# Altium PCB PCB-15_19.PcbDoc (part 4 of 4)
Units mm, origin at the board's own origin, x right, y up, seen from the top; angles counter-clockwise.
Board outline 190 x 150 mm, 6 copper layers (Top Layer, Mid-Layer 1, VCC3V3, GND, Mid-Layer 2, Bottom Layer), stack 1.173 mm thick; 129 components, 396 nets, 1206 pads, 565 vias.
Unrouted connection lines stored in the file: 15.
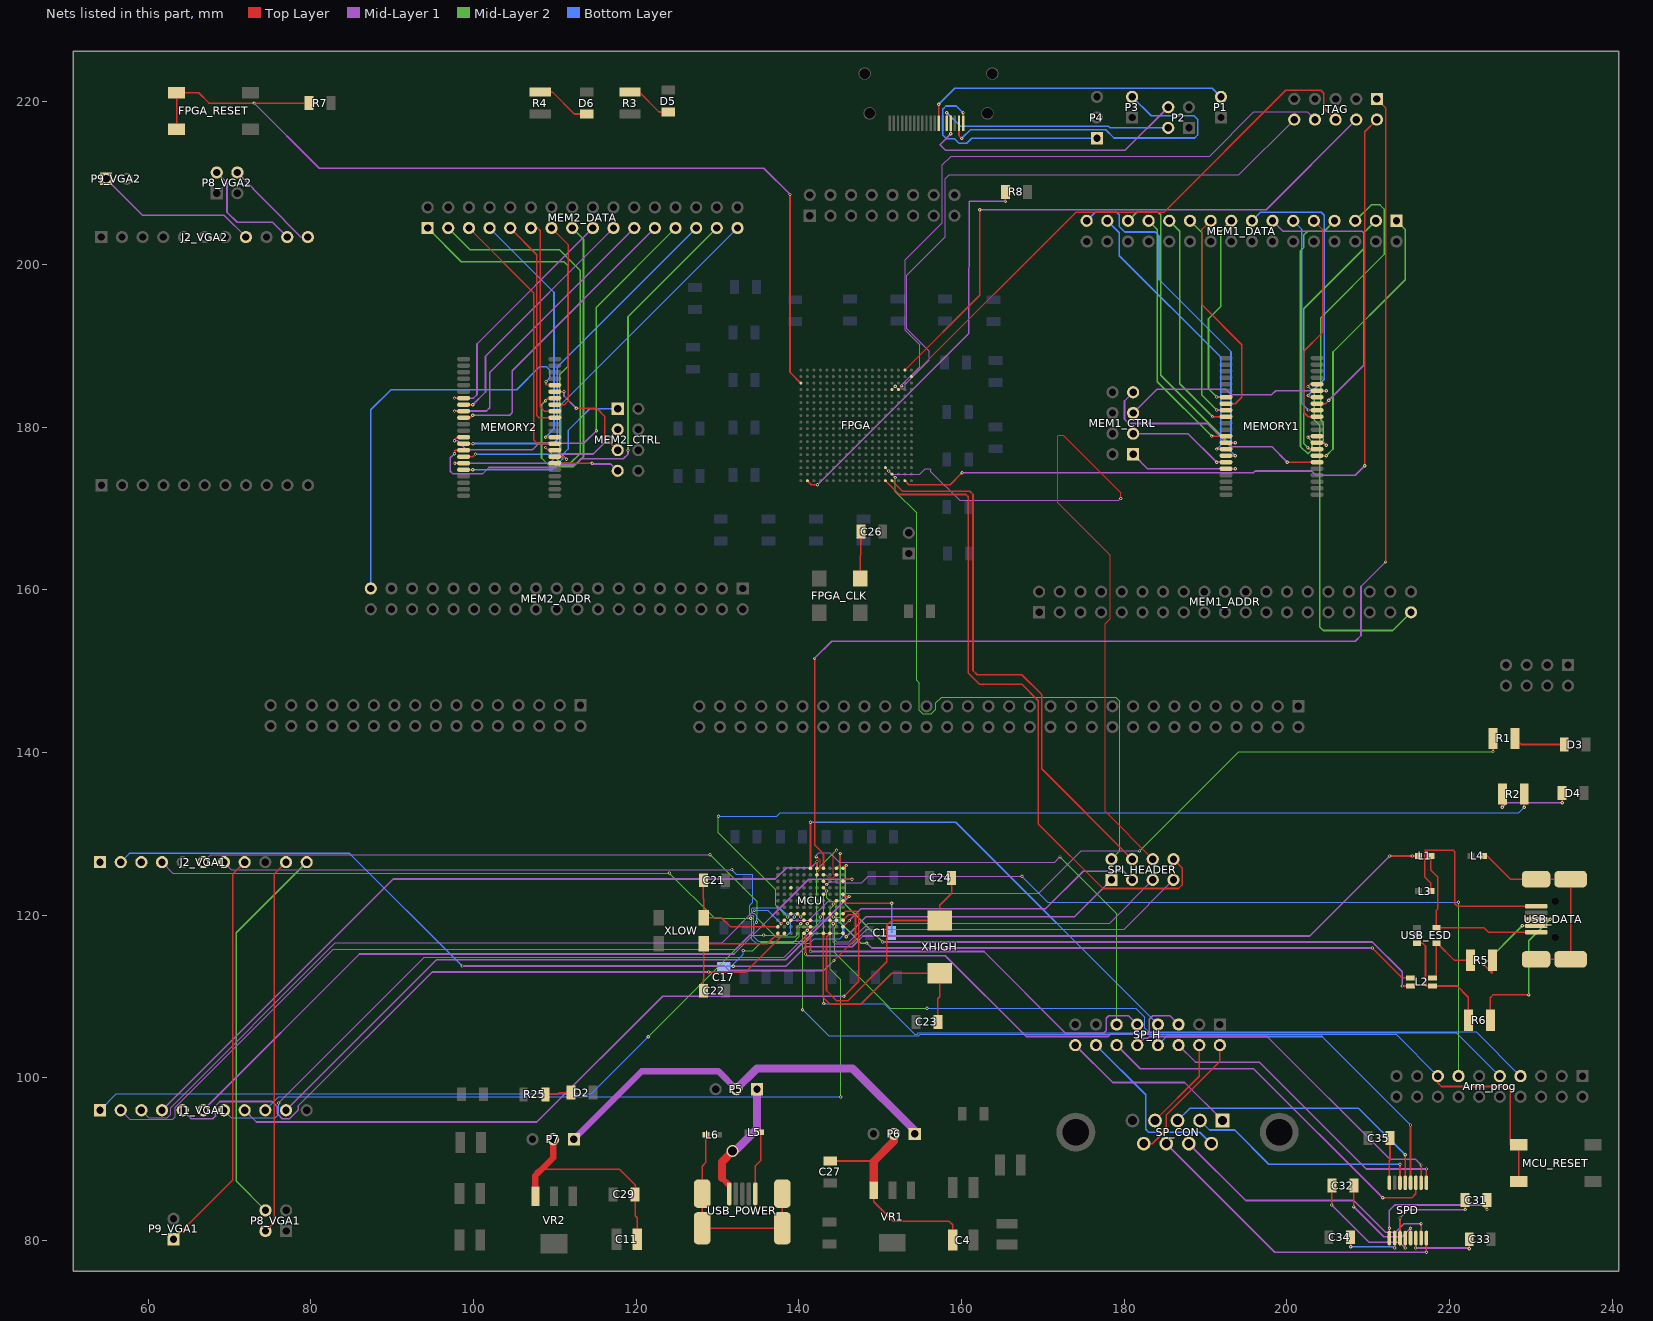
[diagram p8: the nets of this part, all layers, seen from the top]

## Via types
v1: diameter 0.4, hole 0.2, Top Layer to Bottom Layer, 548 vias
v2: diameter 0.4, hole 0.25, Top Layer to Bottom Layer, tented top, 9 vias
v3: diameter 7, hole 5, Top Layer to Bottom Layer, 4 vias
v4: diameter 1.3, hole 0.9, Top Layer to Bottom Layer, 3 vias
v5: diameter 1.5, hole 1.1, Top Layer to Bottom Layer, 1 vias

## Nets (pads, with @x,y where several pads share a name; then routed paths per layer and width w, separated by ;. In a path a pad name is that pad's centre, name@x,y a point inside that pad or via, vN(x,y) a via of type N, cw(c..) or ccw(c..) an arc to the next point about the centre after c; other vN are vias at no path point) (continued)
I_MEMORY.ADDR18_Data_mem1: MEM1_ADDR.37 MEMORY1.18 | length 43.7
  Top Layer w0.2: v1(202.59,184.988) 202.888,185.286 MEMORY1.18@203.72,185.286
  Mid-Layer 2 w0.2: v1(202.59,184.988) 203.377,184.201 203.377,180.858 204.038,180.198 204.038,155.423 204.47,154.991 213.03,154.991 MEM1_ADDR.37@215.265,157.226
I_MEMORY.ADDR18_Data_mem2: MEM2_ADDR.37 MEMORY2.18 | length 49.4
  Top Layer w0.2: v1(108.915,185.572) 108.915,185.184 MEMORY2.18@109.994,185.159
  Bottom Layer w0.2: MEM2_ADDR.37@87.376,160.147 87.376,182.118 89.865,184.607 105.334,184.607 108.128,187.401 108.979,187.401 109.372,187.007 109.372,186.03 v1(108.915,185.572)
I_MEMORY.BUS0_Data_mem1: MEM1_DATA.1 MEMORY1.7 | length 34.5
  Top Layer w0.2: MEMORY1.7@203.72,176.486 204.844,176.486 v1(204.851,176.479)
  Mid-Layer 2 w0.2: v1(204.851,176.479) 205.669,177.297 205.669,189.235 214.554,198.12 214.554,204.292 MEM1_DATA.1@213.487,205.359
I_MEMORY.BUS0_Data_mem2: MEM2_DATA.1 MEMORY2.7 | length 45.3
  Top Layer w0.2: MEMORY2.7@109.994,176.359 111.125,176.359 v1(111.442,176.042)
  Mid-Layer 2 w0.2: MEM2_DATA.1@94.361,204.47 98.501,200.33 111.125,200.33 111.633,199.822 111.633,187.475 110.617,186.459 110.617,176.867 v1(111.442,176.042)
I_MEMORY.BUS1_Data_mem1: MEM1_DATA.3 MEMORY1.8 | length 33
  Top Layer w0.2: v1(202.59,177.47) 202.774,177.286 MEMORY1.8@203.72,177.286
  Mid-Layer 2 w0.2: v1(202.59,177.47) 202.082,177.978 202.082,194.539 209.474,201.93 209.474,203.886 MEM1_DATA.3@210.947,205.359
I_MEMORY.BUS1_Data_mem2: MEM2_DATA.3 MEMORY2.8 | length 47.7
  Top Layer w0.2: v1(108.864,177.482) 109.188,177.159 MEMORY2.8@109.994,177.159
  Mid-Layer 2 w0.2: MEM2_DATA.3@96.901,204.47 99.568,201.803 110.566,201.803 113.124,199.246 113.124,176.753 111.912,175.541 110.805,175.541 v1(108.864,177.482)
I_MEMORY.BUS2_Data_mem1: MEM1_DATA.5 MEMORY1.9 | length 38.4
  Top Layer w0.2: MEMORY1.9@203.72,178.086 204.54,178.086 v1(204.851,177.775)
  Mid-Layer 2 w0.2: v1(204.851,177.775) 204.47,178.156 204.47,180.594 204.153,180.911 204.153,193.408 212.014,201.27 212.014,206.756 211.455,207.315 210.363,207.315 MEM1_DATA.5@208.407,205.359
I_MEMORY.BUS2_Data_mem2: MEM2_DATA.5 MEMORY2.9 | length 32.1
  Top Layer w0.2: MEM2_DATA.5@99.441,204.47 107.391,196.52 107.391,178.435 107.844,177.983 109.364,177.983 109.364,177.959 MEMORY2.9@109.994,177.959
I_MEMORY.BUS3_Data_mem1: MEM1_DATA.7 MEMORY1.10 | length 35.6
  Top Layer w0.2: v1(202.59,178.74) 202.737,178.886 MEMORY1.10@203.72,178.886
  Mid-Layer 2 w0.2: v1(202.59,178.74) 203.098,178.232 203.098,177.209 202.597,176.708 201.682,177.571 201.682,201.682 202.057,202.057 202.057,203.581 202.565,204.089 204.597,204.089 MEM1_DATA.7@205.867,205.359
I_MEMORY.BUS3_Data_mem2: MEM2_DATA.7 MEMORY2.10 | length 30.6
  Top Layer w0.2: v1(108.864,178.765) 108.871,178.759 MEMORY2.10@109.994,178.759
  Bottom Layer w0.2: MEM2_DATA.7@101.981,204.47 109.905,196.546 109.905,179.806 v1(108.864,178.765)
I_MEMORY.BUS4_Data_mem1: MEM1_DATA.9 MEMORY1.13 | length 26.8
  Top Layer w0.2: MEM1_DATA.9@203.327,205.359 204.394,204.292 204.394,191.637 202.09,189.333 202.09,181.811 202.616,181.286 MEMORY1.13@203.72,181.286
I_MEMORY.BUS4_Data_mem2: MEM2_DATA.9 MEMORY2.13 | length 26.7
  Top Layer w0.2: MEM2_DATA.9@104.521,204.47 107.791,201.2 107.791,181.42 108.053,181.159 MEMORY2.13@109.994,181.159
I_MEMORY.BUS5_Data_mem1: MEM1_DATA.11 MEMORY1.14 | length 25.1
  Top Layer w0.2: v1(202.616,182.093) 202.622,182.086 MEMORY1.14@203.72,182.086
  Bottom Layer w0.2: MEM1_DATA.11@200.787,205.359 201.854,204.292 201.854,182.855 v1(202.616,182.093)
I_MEMORY.BUS5_Data_mem2: MEM2_DATA.11 MEMORY2.14 | length 24.9
  Top Layer w0.2: MEM2_DATA.11@107.061,204.47 107.874,204.47 108.191,204.153 108.191,182.49 108.723,181.959 MEMORY2.14@109.994,181.959
I_MEMORY.BUS6_Data_mem1: MEM1_DATA.13 MEMORY1.15 | length 35.8
  Top Layer w0.2: MEMORY1.15@203.72,182.886 204.755,182.886 v1(205.156,183.286)
  Mid-Layer 1 w0.2: MEM1_DATA.13@198.247,205.359 199.517,204.089 209.245,204.089 209.474,203.86 209.474,187.604 v1(205.156,183.286)
I_MEMORY.BUS6_Data_mem2: MEM2_DATA.13 MEMORY2.15 | length 23.9
  Top Layer w0.2: MEM2_DATA.13@109.601,204.47 111.633,202.438 111.633,183.197 111.194,182.759 MEMORY2.15@109.994,182.759
I_MEMORY.BUS7_Data_mem1: MEM1_DATA.15 MEMORY1.16 | length 33.7
  Top Layer w0.2: v1(202.616,183.896) 202.826,183.686 MEMORY1.16@203.72,183.686
  Bottom Layer w0.2: MEM1_DATA.15@195.707,205.359 196.774,206.426 204.229,206.426 204.597,206.058 204.597,185.877 v1(202.616,183.896)
I_MEMORY.BUS7_Data_mem2: MEM2_DATA.15 MEMORY2.16 | length 43.3
  Top Layer w0.2: v1(108.864,183.236) 109.188,183.559 MEMORY2.16@109.994,183.559
  Mid-Layer 2 w0.2: v1(108.864,183.236) 108.356,182.728 108.356,176.2 109.415,175.141 112.3,175.141 113.524,176.365 113.524,203.087 MEM2_DATA.15@112.141,204.47
I_MEMORY.BUS8_Data_mem1: MEM1_DATA.17 MEMORY1.29 | length 24.4
  Top Layer w0.2: v1(191.389,183.693) 191.396,183.686 MEMORY1.29@192.52,183.686
  Mid-Layer 2 w0.2: v1(191.389,183.693) 190.373,184.709 190.373,193.319 191.897,194.843 191.897,204.089 MEM1_DATA.17@193.167,205.359
I_MEMORY.BUS8_Data_mem2: MEM2_DATA.17 MEMORY2.29 | length 30.5
  Top Layer w0.2: v1(97.663,183.566) 97.67,183.559 MEMORY2.29@98.794,183.559
  Mid-Layer 1 w0.2: v1(97.663,183.566) 100.013,183.566 100.432,183.985 100.432,190.221 MEM2_DATA.17@114.681,204.47
I_MEMORY.BUS9_Data_mem1: MEM1_DATA.19 MEMORY1.30 | length 26.4
  Top Layer w0.2: MEM1_DATA.19@190.627,205.359 189.56,204.292 189.56,195.047 194.467,190.14 194.467,183.678 193.675,182.886 MEMORY1.30@192.52,182.886
I_MEMORY.BUS9_Data_mem2: MEM2_DATA.19 MEMORY2.30 | length 30
  Top Layer w0.2: MEMORY2.30@98.794,182.759 99.918,182.759 v1(99.924,182.753)
  Mid-Layer 1 w0.2: v1(99.924,182.753) 101.473,184.302 101.473,188.722 MEM2_DATA.19@117.221,204.47
I_MEMORY.BUS10_Data_mem1: MEM1_DATA.21 MEMORY1.31 | length 25.8
  Top Layer w0.2: v1(191.389,182.093) 191.396,182.086 MEMORY1.31@192.52,182.086
  Mid-Layer 2 w0.2: MEM1_DATA.21@188.087,205.359 189.56,203.886 189.56,183.921 v1(191.389,182.093)
I_MEMORY.BUS10_Data_mem2: MEM2_DATA.21 MEMORY2.31 | length 35.1
  Top Layer w0.2: v1(97.663,181.966) 97.67,181.959 MEMORY2.31@98.794,181.959
  Mid-Layer 1 w0.2: v1(97.663,181.966) 97.668,181.97 101.605,181.97 102.006,182.372 102.006,186.715 MEM2_DATA.21@119.761,204.47
I_MEMORY.BUS11_Data_mem1: MEM1_DATA.23 MEMORY1.32 | length 27.9
  Top Layer w0.2: v1(190.875,181.286) MEMORY1.32@192.52,181.286
  Mid-Layer 2 w0.2: MEM1_DATA.23@185.547,205.359 186.817,204.089 186.817,185.344 v1(190.875,181.286)
I_MEMORY.BUS11_Data_mem2: MEM2_DATA.23 MEMORY2.32 | length 36.2
  Top Layer w0.2: MEMORY2.32@98.794,181.159 99.612,181.159 v1(99.924,181.47)
  Mid-Layer 1 w0.2: v1(99.924,181.47) 104.457,181.47 104.775,181.788 104.775,186.944 MEM2_DATA.23@122.301,204.47
I_MEMORY.BUS12_Data_mem1: MEM1_DATA.25 MEMORY1.35 | length 31.4
  Top Layer w0.2: v1(190.754,178.892) 190.76,178.886 MEMORY1.35@192.52,178.886
  Mid-Layer 2 w0.2: MEM1_DATA.25@183.007,205.359 184.074,204.292 184.074,185.572 v1(190.754,178.892)
I_MEMORY.BUS12_Data_mem2: MEM2_DATA.25 MEMORY2.35 | length 49.2
  Top Layer w0.2: v1(97.663,178.315) 97.663,178.429 97.993,178.759 MEMORY2.35@98.794,178.759
  Mid-Layer 1 w0.2: v1(97.663,178.315) 98.043,178.315 99.168,177.19 107.239,177.19 108.052,178.003 113.563,178.003 v1(115.113,179.553)
  Mid-Layer 2 w0.2: v1(115.113,179.553) 115.113,194.742 MEM2_DATA.25@124.841,204.47
I_MEMORY.BUS13_Data_mem1: MEM1_DATA.27 MEMORY1.36 | length 38
  Top Layer w0.2: MEMORY1.36@192.52,178.086 v1(193.65,178.086)
  Mid-Layer 2 w0.2: MEM1_DATA.27@180.467,205.359 181.534,206.426 184.15,206.426 184.48,206.096 184.48,186.385 192.779,178.086 v1(193.65,178.086)
I_MEMORY.BUS13_Data_mem2: MEM2_DATA.27 MEMORY2.36 | length 44.8
  Top Layer w0.2: MEMORY2.36@98.794,177.959 v1(99.937,177.959)
  Bottom Layer w0.2: v1(99.937,177.959) 99.96,177.983 109.855,177.983 110.305,178.433 110.305,187.394 MEM2_DATA.27@127.381,204.47
I_MEMORY.BUS14_Data_mem1: MEM1_DATA.29 MEMORY1.37 | length 35.2
  Top Layer w0.2: v1(191.389,177.292) 191.395,177.286 MEMORY1.37@192.52,177.286
  Bottom Layer w0.2: MEM1_DATA.29@177.927,205.359 179.4,203.886 179.4,201.066 191.897,188.57 191.897,177.8 v1(191.389,177.292)
I_MEMORY.BUS14_Data_mem2: MEM2_DATA.29 MEMORY2.37 | length 59.2
  Top Layer w0.2: v1(97.663,176.728) 97.688,177.159 MEMORY2.37@98.794,177.159
  Mid-Layer 1 w0.2: v1(97.663,176.728) 97.155,176.22 97.155,174.561 97.472,174.244 101.117,174.244 101.905,175.031 110.194,175.031 110.497,175.335 112.47,175.335 113.233,176.098 118.427,176.098 118.999,176.67 v1(118.999,177.165)
  Mid-Layer 2 w0.2: v1(118.999,177.165) 118.999,193.548 MEM2_DATA.29@129.921,204.47
I_MEMORY.BUS15_Data_mem1: MEM1_DATA.31 MEMORY1.38 | length 43.4
  Top Layer w0.2: MEMORY1.38@192.52,176.486 193.643,176.486 v1(193.65,176.479)
  Bottom Layer w0.2: MEM1_DATA.31@175.387,205.359 176.454,206.426 179.07,206.426 179.4,206.096 179.4,204.673 180.086,203.987 183.832,203.987 184.277,203.543 184.277,198.145 193.142,189.281 193.142,176.987 v1(193.65,176.479)
I_MEMORY.BUS15_Data_mem2: MEM2_DATA.31 MEMORY2.38 | length 48.6
  Top Layer w0.2: MEMORY2.38@98.794,176.359 99.924,176.359 v1(100.247,176.682)
  Bottom Layer w0.2: v1(100.247,176.682) 110.346,176.682 110.705,177.041 110.705,182.714 MEM2_DATA.31@132.461,204.47
I_MEMORY.ENABLE_Data_mem1: MEM1_CTRL.7 MEMORY1.6 | length 29.6
  Top Layer w0.2: v1(200.056,175.686) MEMORY1.6@203.72,175.686
  Mid-Layer 1 w0.2: MEM1_CTRL.7@181.102,184.277 180.035,183.21 180.035,180.975 180.569,180.442 190.195,180.442 193.065,177.571 198.171,177.571 v1(200.056,175.686)
I_MEMORY.ENABLE_Data_mem2: MEM2_CTRL.7 MEMORY2.6 | length 8.1
  Top Layer w0.2: MEMORY2.6@109.994,175.559 110.925,175.559 110.942,175.541 114.562,175.541 v1(114.579,175.559)
  Mid-Layer 1 w0.2: v1(114.579,175.559) 114.675,175.463 116.891,175.463 MEM2_CTRL.7@117.729,174.625
I_MEMORY.LB_Data_mem1: MEM1_CTRL.3 MEMORY1.39 | length 12.9
  Top Layer w0.2: v1(191.389,175.666) 191.409,175.686 MEMORY1.39@192.52,175.686
  Mid-Layer 1 w0.2: MEM1_CTRL.3@181.102,179.197 187.858,179.197 v1(191.389,175.666)
I_MEMORY.LB_Data_mem2: MEM2_CTRL.3 MEMORY2.39 | length 22.8
  Top Layer w0.2: v1(97.715,175.565) 97.721,175.559 MEMORY2.39@98.794,175.559
  Mid-Layer 1 w0.2: v1(97.715,175.565) 109.347,175.565 110.472,176.689 114.713,176.689 MEM2_CTRL.3@117.729,179.705
I_MEMORY.UB_Data_mem1: MEM1_CTRL.1 MEMORY1.40 | length 14.4
  Top Layer w0.2: MEMORY1.40@192.52,174.886 193.643,174.886 v1(193.65,174.879)
  Mid-Layer 1 w0.2: MEM1_CTRL.1@181.102,176.657 182.88,174.879 v1(193.65,174.879)
I_MEMORY.UB_Data_mem2: MEM2_CTRL.1 MEMORY2.40 | length 23.7
  Top Layer w0.2: MEMORY2.40@98.794,174.759 v1(99.924,174.759)
  Bottom Layer w0.2: v1(99.924,174.759) 109.633,174.759 110.939,176.065 110.939,176.606 111.633,177.3 111.633,179.578 114.3,182.245 MEM2_CTRL.1@117.729,182.245
I_MEMORY.WRITE_Data_mem1: MEM1_CTRL.5 MEMORY1.17 | length 26.6
  Top Layer w0.2: MEMORY1.17@203.72,184.486 204.845,184.486 v1(204.851,184.48)
  Mid-Layer 1 w0.2: MEM1_CTRL.5@181.102,181.737 183.998,184.633 192.481,184.633 193.142,183.972 198.12,183.972 198.628,184.48 v1(204.851,184.48)
I_MEMORY.WRITE_Data_mem2: MEM2_CTRL.5 MEMORY2.17 | length 12.5
  Top Layer w0.2: MEMORY2.17@109.994,184.359 111.119,184.359 v1(111.125,184.353) ; v1(112.624,182.321) 115.138,182.321 116.154,181.305 116.154,178.74 MEM2_CTRL.5@117.729,177.165
  Mid-Layer 1 w0.2: v1(111.125,184.353) 111.125,183.82 v1(112.624,182.321)
I_SPI.CLK: MCU.J9 SPI_HEADER.5 | length 45
  Top Layer w0.1: MCU.J9@143.829,119.354 144.221,118.962 v1(144.221,118.948)
  Mid-Layer 1 w0.1: v1(144.221,118.948) 144.221,117.17 144.678,116.713 146.209,116.713 148.52,119.024 178.206,119.024 SPI_HEADER.5@183.515,124.333
I_SPI.CS: MCU.J10 SPI_HEADER.7 | length 48
  Top Layer w0.1: v1(144.247,118.972) MCU.J10@144.629,119.354
  Mid-Layer 1 w0.1: v1(144.247,118.972) 144.247,116.688 144.475,116.459 146.56,116.459 148.363,118.262 179.984,118.262 SPI_HEADER.7@186.055,124.333
I_SPI.RX: MCU.K11 SPI_HEADER.3 | length 38.8
  Top Layer w0.2: MCU.K11@145.429,118.554 v1(146.217,119.342)
  Mid-Layer 1 w0.2: v1(146.217,119.342) 147.677,120.802 170.358,120.802 174.955,125.4 179.908,125.4 SPI_HEADER.3@180.975,124.333
I_SPI.TX: MCU.L11 SPI_HEADER.1 | length 36.1
  Top Layer w0.2: MCU.L11@145.429,117.754 145.821,117.362 v1(145.821,117.348)
  Mid-Layer 1 w0.2: v1(145.821,117.348) 148.26,119.786 173.888,119.786 SPI_HEADER.1@178.435,124.333
MCU_LEDS.LED_1: MCU.J3 R1.1 | length 97.6
  Top Layer w0.1: v1(138.633,118.999) 138.674,118.999 MCU.J3@139.029,119.354
  Top Layer w0.2: v1(225.345,140.105) R1.1@225.345,141.732
  Mid-Layer 1 w0.1: v1(138.633,118.999) 138.989,119.355 141.249,119.355 143.612,121.717 144.907,121.717 145.847,122.657 169.498,122.657 174.73,127.889 v1(181.889,127.889)
  Mid-Layer 2 w0.1: v1(181.889,127.889) 194.105,140.105 v1(225.345,140.105)
MCU_LEDS.LED_2: MCU.H3 R2.1 | length 117.6
  Top Layer w0.1: v1(138.633,119.761) 138.636,119.761 MCU.H3@139.029,120.154
  Top Layer w0.2: v1(229.188,133.247) R2.1@229.188,134.874
  Mid-Layer 2 w0.1: v1(130.124,132.156) 130.124,130.15 137.185,123.088 137.185,121.209 v1(138.633,119.761)
  Bottom Layer w0.1: v1(130.124,132.156) 137.287,132.156 137.719,132.588 228.529,132.588 v1(229.188,133.247)
MCU_VGA-I/O.J1_P2: J1_VGA1.9 MCU.F10 | length 96.5
  Top Layer w0.1: v1(144.247,121.361) 144.45,121.564 144.629,121.564 MCU.F10@144.629,121.754
  Mid-Layer 2 w0.1: v1(144.247,121.361) 144.247,121.158 143.866,120.777 143.866,113.335 145.161,112.039 v1(145.161,97.638)
  Bottom Layer w0.1: J1_VGA1.9@74.41,96.012 76.036,97.638 v1(145.161,97.638)
MCU_VGA-I/O.J1_P3: J1_VGA1.10 MCU.E11 | length 81
  Top Layer w0.2: MCU.E11@145.429,122.554 145.682,122.301 v1(146.202,122.301)
  Mid-Layer 1 w0.2: J1_VGA1.10@76.95,96.012 95.441,114.503 138.405,114.503 v1(146.202,122.301)
MCU_VGA-I/O.J1_P8: J1_VGA1.8 MCU.H11 | length 93.8
  Top Layer w0.2: MCU.H11@145.429,120.154 145.752,120.477 147.002,120.477 147.372,120.107 147.372,111.85 v1(145.542,110.02)
  Mid-Layer 1 w0.2: J1_VGA1.8@71.87,96.012 73.32,94.562 107.795,94.562 123.253,110.02 v1(145.542,110.02)
MCU_VGA-I/O.J1_P9: J1_VGA1.7 MCU.H8 | length 85.6
  Top Layer w0.1: v1(142.621,119.761) 142.636,119.761 MCU.H8@143.029,120.154
  Mid-Layer 1 w0.1: v1(76.048,96.901) 93.935,114.788 138.208,114.788 142.621,119.201 v1(142.621,119.761)
  Bottom Layer w0.1: J1_VGA1.7@69.33,96.012 70.244,95.098 75.641,95.098 76.048,95.504 v1(76.048,96.901)
MCU_VGA-I/O.J1_P10: J1_VGA1.6 MCU.C11 | length 92.7
  Top Layer w0.2: MCU.C11@145.429,124.154 145.684,124.409 v1(146.533,124.409)
  Mid-Layer 1 w0.2: J1_VGA1.6@66.79,96.012 85.992,115.214 132.029,115.214 141.224,124.409 v1(146.533,124.409)
MCU_VGA-I/O.J1_P11: J1_VGA1.5 MCU.L2 | length 87.2
  Top Layer w0.2: v1(128.93,113.005) 133.48,113.005 MCU.L2@138.229,117.754
  Mid-Layer 1 w0.2: J1_VGA1.5@64.25,96.012 65.317,94.945 67.945,94.945 68.275,95.275 68.275,96.52 68.834,97.079 75.248,97.079 75.895,96.431 75.895,95.567 76.501,94.962 77.385,94.962 78.435,96.012 78.435,96.52 94.92,113.005 v1(128.93,113.005)
MCU_VGA-I/O.J1_P12: J1_VGA1.4 MCU.A7 | length 94
  Top Layer w0.2: MCU.A7@142.229,125.754 142.229,126.572 v1(142.24,126.583)
  Mid-Layer 1 w0.2: J1_VGA1.4@61.71,96.012 90.133,124.435 137.109,124.435 138.506,125.832 141.489,125.832 v1(142.24,126.583)
MCU_VGA-I/O.J1_P13: J1_VGA1.3 MCU.J2 | length 91.3
  Top Layer w0.1: v1(137.82,118.948) 137.823,118.948 MCU.J2@138.229,119.354
  Mid-Layer 1 w0.1: J1_VGA1.3@59.17,96.012 60.084,95.098 62.345,95.098 62.751,95.504 62.751,96.33 83.033,116.611 130.581,116.611 v1(134.544,120.574)
  Bottom Layer w0.1: v1(134.544,120.574) 136.195,120.574 v1(137.82,118.948)
MCU_VGA-I/O.J1_P14: J1_VGA1.2 MCU.H5 | length 99.1
  Top Layer w0.1: v1(140.233,119.761) 140.437,119.964 140.437,120.154 MCU.H5@140.629,120.154
  Mid-Layer 1 w0.1: J1_VGA1.2@56.63,96.012 57.748,94.894 63.043,94.894 63.35,95.202 63.35,96.385 82.738,115.773 132.234,115.773 134.544,118.083 134.544,118.872 v1(134.798,119.126)
  Bottom Layer w0.1: v1(134.798,119.126) 134.798,119.939 134.518,120.218 134.315,120.218 134.185,120.348 134.185,120.802 134.312,120.929 137.643,120.929 138.379,120.193 139.802,120.193 v1(140.233,119.761)
MCU_VGA-I/O.J1_P15: J1_VGA1.1 MCU.H4 | length 96.5
  Top Layer w0.1: v1(139.436,119.761) MCU.H4@139.829,120.154
  Mid-Layer 2 w0.1: v1(121.488,105.054) 133.985,117.551 v1(135.687,117.551)
  Bottom Layer w0.1: J1_VGA1.1@54.09,96.012 56.097,98.019 114.452,98.019 v1(121.488,105.054) ; v1(135.687,117.551) 138.582,117.551 138.989,117.958 138.989,119.314 v1(139.436,119.761)
MCU_VGA-I/O.J2_P0: J2_VGA1.6 MCU.J5 | length 81
  Top Layer w0.1: v1(140.233,118.948) 140.233,118.958 MCU.J5@140.629,119.354
  Mid-Layer 1 w0.1: J2_VGA1.6@66.79,126.51 67.712,127.432 v1(129.083,127.432)
  Mid-Layer 2 w0.1: v1(129.083,127.432) 134.894,121.621 134.894,119.589 137.135,117.348 139.548,117.348 139.776,117.577 139.776,118.491 v1(140.233,118.948)
MCU_VGA-I/O.J2_P1: J2_VGA1.7 MCU.J6 | length 91.6
  Top Layer w0.1: v1(141.021,118.948) 141.023,118.948 MCU.J6@141.429,119.354
  Mid-Layer 1 w0.1: J2_VGA1.7@69.33,126.51 70.237,125.603 v1(131.775,125.603)
  Bottom Layer w0.1: v1(131.775,125.603) 132.334,125.044 134.341,125.044 134.341,121.59 133.985,121.234 133.985,120.086 134.112,119.959 134.315,119.959 134.442,119.832 134.442,117.323 134.986,116.779 140.973,116.779 141.948,117.754 145.288,117.754 145.39,117.856 145.39,118.669 144.729,119.329 141.402,119.329 v1(141.021,118.948)
MCU_VGA-I/O.J2_P4: J2_VGA1.3 MCU.D3
MCU_VGA-I/O.J2_P5: J2_VGA1.2 MCU.J11 | length 103
  Top Layer w0.2: v1(144.312,114.427) 146.972,117.087 146.972,119.857 146.789,120.04 146.115,120.04 MCU.J11@145.429,119.354
  Mid-Layer 1 w0.2: v1(98.603,113.741) 130.861,113.741 131.42,113.182 143.068,113.182 v1(144.312,114.427)
  Bottom Layer w0.2: J2_VGA1.2@56.63,126.51 57.704,127.584 84.76,127.584 v1(98.603,113.741)
MCU_VGA-I/O.J2_P6: J2_VGA1.4 MCU.H9 | length 93.6
  Top Layer w0.1: MCU.H9@143.829,120.154 144.222,119.761 v1(144.247,119.761)
  Mid-Layer 1 w0.1: J2_VGA1.4@61.71,126.51 63.049,125.171 v1(124.079,125.171)
  Mid-Layer 2 w0.1: v1(124.079,125.171) 129.642,119.609 v1(134.087,119.609)
  Bottom Layer w0.1: v1(134.087,119.609) 134.239,119.456 134.239,117.043 134.747,116.535 141.337,116.535 141.915,117.114 145.054,117.114 145.593,117.653 145.593,119.253 145.085,119.761 v1(144.247,119.761)
MCU_VGA-I/O.J2_P7: J2_VGA1.1 MCU.H10
Net_13: ?.13 P1.2 | length 38.3
  Top Layer w0.2: ?.13@157.195,217.367 v1(157.195,219.685)
  Bottom Layer w0.2: v1(157.195,219.685) 159.176,221.666 190.83,221.666 P1.2@191.897,220.599
Net_15: ?.15 P2.2 | length 29.3
  Top Layer w0.2: ?.15@158.195,217.367 v1(158.195,218.643)
  Bottom Layer w0.2: v1(158.195,218.643) 159.869,216.969 178.079,216.969 178.259,216.789 P2.2@185.42,216.789
Net_16: ?.16 P2.4 | length 33.8
  Top Layer w0.2: v1(158.674,216.078) 158.695,216.099 ?.16@158.695,217.367
  Mid-Layer 1 w0.2: v1(158.674,216.078) 157.353,214.706 158.039,214.02 180.111,214.02 P2.4@185.42,219.329
Net_18: ?.18 P3.2 | length 43.2
  Top Layer w0.2: ?.18@159.695,217.367 159.695,215.819 v1(160.02,215.494)
  Bottom Layer w0.2: v1(160.02,215.494) 161.095,216.569 177.724,216.569 178.748,215.544 188.671,215.544 189.027,215.9 189.027,217.83 188.595,218.262 183.312,218.262 P3.2@180.975,220.599
Net_19: ?.19 P4.1 | length 27.1
  Top Layer w0.2: ?.19@160.195,217.367 v1(160.195,218.643)
  Bottom Layer w0.2: v1(160.195,218.643) 159.357,219.481 158.09,219.481 157.683,219.075 157.683,215.9 158.115,215.468 159.106,215.468 159.69,214.884 160.63,214.884 161.265,215.519 P4.1@176.657,215.519
NetArm_prog_7: Arm_prog.7 MCU.D8 | length 100.4
  Top Layer w0.1: MCU.D8@143.029,123.354 v1(143.434,122.949)
  Mid-Layer 2 w0.1: v1(143.434,122.949) 143.434,122.149 143.866,121.717 144.393,121.717 144.597,121.514 144.597,118.663 144.399,118.466 144.399,115.392 151.257,108.534 v1(155.753,108.534)
  Bottom Layer w0.1: v1(155.753,108.534) 181.432,108.534 182.524,107.442 182.524,106.07 182.956,105.639 223.291,105.639 Arm_prog.7@228.727,100.203
NetArm_prog_9: Arm_prog.9 MCU.E8 | length 101.5
  Top Layer w0.1: MCU.E8@143.029,122.554 143.434,122.959 v1(143.434,122.961)
  Mid-Layer 2 w0.1: v1(143.078,109.118) 143.078,122.606 v1(143.434,122.961)
  Bottom Layer w0.1: v1(143.078,109.118) 150.475,109.118 154.229,105.365 154.539,105.365 154.711,105.537 220.853,105.537 Arm_prog.9@226.187,100.203
NetArm_prog_13: Arm_prog.13 MCU.C8 | length 101.5
  Top Layer w0.1: MCU.C8@143.029,124.154 v1(143.434,123.749)
  Mid-Layer 1 w0.1: v1(143.434,123.749) 143.789,124.104 144.424,124.104 144.577,123.952 147.726,123.952 148.539,124.765 v1(167.437,124.765)
  Mid-Layer 2 w0.1: Arm_prog.13@221.107,100.203 v1(221.107,121.59)
  Bottom Layer w0.1: v1(167.437,124.765) 170.612,121.59 v1(221.107,121.59)
NetArm_prog_15: Arm_prog.15 MCU.K6 MCU_RESET.1 MCU_RESET.3 | length 114.6
  Top Layer w0.1: v1(141.021,118.146) MCU.K6@141.429,118.554
  Top Layer w0.2: Arm_prog.15@218.567,100.203 218.567,99.377 219.011,98.933 227.012,98.933 227.457,98.489 227.457,91.749 MCU_RESET.3@228.517,91.749 MCU_RESET.1@228.517,87.249
  Mid-Layer 2 w0.1: v1(140.462,108.356) 140.462,117.587 v1(141.021,118.146)
  Bottom Layer w0.1: v1(140.462,108.356) 143.654,105.165 154.762,105.165 154.931,105.334 213.436,105.334 Arm_prog.15@218.567,100.203
NetC1_1: C1.1 MCU.F11 | length 9.8
  Top Layer w0.2: MCU.F11@145.429,121.754 145.72,121.463 v1(151.435,121.463)
  Bottom Layer w0.2: C1.1@151.415,117.817 151.415,121.443 v1(151.435,121.463)
NetC4_2: C4.2 C27.2 P6.2 VR1.3 | length 30.8
  Top Layer w0.2: C27.2@143.86,89.77 148.658,89.77 149.211,89.218 VR1.3@149.211,86.156 149.211,84.76 151.599,82.372 158.458,82.372 158.915,81.915 C4.2@158.915,80.04
  Top Layer w1: VR1.3@149.211,86.156 149.211,89.721 151.71,92.22 P6.2@151.71,93.1
NetC11_2: C11.2 C29.2 P7.2 VR2.3 | length 31
  Top Layer w0.2: VR2.3@107.606,85.406 107.606,87.966 107.606,88.429 107.95,88.773 117.924,88.773 119.88,86.817 C29.2@119.88,85.66 119.88,83.024 120.125,82.779 C11.2@120.125,80.15
  Top Layer w0.8: VR2.3@107.606,85.406 107.606,87.966 109.8,90.16 P7.2@109.8,92.44
NetC17_2: C17.2 L1.1 MCU.B8 MCU.B10 | length 121.2
  Top Layer w0.1: MCU.B8@143.029,124.954 143.299,124.954 143.691,124.562 144.237,124.562 MCU.B10@144.629,124.954 144.362,124.954 144.247,125.07 144.247,127.61 v1(144.628,127.991)
  Top Layer w0.2: v1(212.649,127.271) v1(215.411,127.271) L1.1@216.163,127.271
  Mid-Layer 1 w0.2: v1(131.928,113.716) 138.43,113.716 140.818,116.103 146.558,116.103 147.879,117.424 202.802,117.424 v1(212.649,127.271)
  Mid-Layer 2 w0.1: v1(133.172,115.646) 134.341,115.646 135.382,116.688 139.395,116.688 140.081,117.373 140.081,118.44 140.183,118.542 142.062,118.542 142.189,118.669 142.189,125.552 v1(144.628,127.991)
  Bottom Layer w0.1: C17.2@130.761,113.706 131.674,113.706 133.172,115.205 v1(133.172,115.646)
  Bottom Layer w0.2: C17.2@130.761,113.706 v1@131.918,113.706 ; v1(131.928,113.716) v1@131.918,113.706 ; v1(131.938,113.706) v1@131.918,113.706
NetC21_2: C21.2 MCU.K1 XLOW.1 | length 14.2
  Top Layer w0.2: C21.2@128.268,124.294 128.268,121.981 128.304,121.945 XLOW.1@128.304,119.685 ; XLOW.1@128.304,119.671 XLOW.1@128.304,119.685 ; MCU.K1@137.429,118.554 131.611,118.554 130.48,119.685 XLOW.1@128.304,119.685
NetC22_2: C22.2 MCU.L1 XLOW.4 | length 15.4
  Top Layer w0.2: C22.2@128.268,110.705 128.304,113.599 XLOW.4@128.304,116.459 ; XLOW.4@128.304,116.471 XLOW.4@128.304,116.459 ; MCU.L1@137.429,117.754 136.134,116.459 XLOW.4@128.304,116.459
NetC23_2: C23.2 MCU.L8 XHIGH.1 | length 30.2
  Top Layer w0.2: MCU.L8@143.029,117.754 143.029,117.277 143.009,117.257 143.009,109.865 143.832,109.042 147.611,109.042 151.41,112.84 XHIGH.1@157.33,112.84 157.33,109.968 157.09,109.728 C23.2@157.09,106.87
NetC24_2: C24.2 MCU.L9 XHIGH.2 | length 34.2
  Top Layer w0.2: MCU.L9@143.829,117.754 143.429,117.354 143.429,116.098 143.409,116.078 143.409,110.718 144.678,109.449 146.025,109.449 150.825,114.249 150.825,118.745 151.42,119.34 XHIGH.2@157.33,119.34 157.33,121.209 158.79,122.669 C24.2@158.79,124.57
NetC31_1: C31.1 SPD.3 | length 12.1
  Top Layer w0.2: SPD.3@213.909,80.293 v1(213.909,82.753) ; C31.1@221.916,84.963 221.916,83.798 v1(221.92,83.795)
  Mid-Layer 1 w0.2: v1(213.909,82.753) 214.95,83.795 v1(221.92,83.795)
NetC31_2: C31.2 SPD.1 | length 17.1
  Top Layer w0.2: SPD.1@212.609,80.293 v1(212.609,81.509) ; v1(224.616,83.795) C31.2@224.616,84.963
  Mid-Layer 1 w0.2: v1(212.609,81.509) 212.609,83.679 213.284,84.353 224.057,84.353 v1(224.616,83.795)
NetC32_1: C32.1 SPD.5 | length 12.8
  Top Layer w0.2: v1(208.233,84.125) C32.1@208.233,86.741 ; SPD.5@215.209,80.293 215.209,81.498 v1(215.214,81.503)
  Mid-Layer 1 w0.2: v1(208.233,84.125) 211.916,80.442 214.153,80.442 v1(215.214,81.503)
NetC32_2: C32.2 SPD.4 | length 14.8
  Top Layer w0.2: v1(205.533,84.353) C32.2@205.533,86.741 ; v1(214.554,79.07) 214.559,79.075 SPD.4@214.559,80.293
  Mid-Layer 1 w0.2: v1(205.533,84.353) 210.13,79.756 213.868,79.756 v1(214.554,79.07)
NetC33_2: C33.2 SPD.6 | length 9
  Top Layer w0.2: v1(215.849,79.07) 215.859,79.08 SPD.6@215.859,80.293 ; C33.2@222.424,80.137 222.424,78.972 v1(222.428,78.969)
  Mid-Layer 1 w0.2: v1(215.849,79.07) 222.326,79.07 v1(222.428,78.969)
NetC34_2: C34.2 SPD.2 | length 7.9
  Top Layer w0.2: v1(207.852,79.223) C34.2@207.852,80.391 ; v1(213.258,79.07) SPD.2@213.259,80.293
  Bottom Layer w0.2: v1(207.852,79.223) 213.106,79.223 v1(213.258,79.07)
NetC35_2: C35.2 SPD.16 | length 5.5
  Top Layer w0.2: SPD.16@212.609,87.093 212.609,89.789 212.678,89.858 C35.2@212.678,92.583
NetD2_1: D2.1 R25.2 | length 3.2
  Top Layer w0.2: R25.2@108.86,97.96 110.312,97.96 110.522,98.17 D2.1@111.99,98.17
NetD3_1: D3.1 R1.2 | length 6.4
  Top Layer w0.2: R1.2@228.045,141.732 228.807,140.97 D3.1@234.108,140.97
NetD4_1: D4.1 R2.2 | length 10.4
  Top Layer w0.2: R2.2@226.488,134.874 226.488,133.252 v1(226.492,133.248) ; v1(233.854,133.807) D4.1@233.854,135.001
  Mid-Layer 1 w0.2: v1(226.492,133.248) 227.051,133.807 v1(233.854,133.807)
NetD5_1: D5.1 R3.2 | length 5.7
  Top Layer w0.2: R3.2@119.253,221.187 120.371,221.187 122.817,218.741 D5.1@123.952,218.741
NetD6_1: D6.1 R4.2 | length 6.8
  Top Layer w0.2: R4.2@108.204,221.187 109.703,221.187 112.403,218.487 D6.1@113.919,218.487
NetFPGA_A17: FPGA.A17 JTAG.4 | length 74.4
  Top Layer w0.2: FPGA.A17@153.047,187.007 162.255,196.215 v1(162.255,206.731)
  Mid-Layer 1 w0.2: v1(162.255,206.731) 197.46,206.731 JTAG.4@208.534,217.805
NetFPGA_B18: FPGA.B18 JTAG.6 | length 69.3
  Top Layer w0.2: FPGA.B18@153.847,186.207 174.066,206.426 184.887,206.426 199.873,221.412 204.153,221.412 204.521,221.043 204.521,219.278 JTAG.6@205.994,217.805
NetFPGA_C1: FPGA.C1 FPGA_RESET.1 FPGA_RESET.3 R7.1 | length 115.6
  Top Layer w0.2: FPGA_RESET.1@63.5,216.62 FPGA_RESET.3@63.5,221.12 66.205,221.12 67.488,219.837 v1(73.025,219.837) R7.1@79.803,219.837 ; v1(138.913,208.61) 138.913,186.741 FPGA.C1@140.247,185.407
  Mid-Layer 1 w0.2: v1(73.025,219.837) 81.026,211.836 135.687,211.836 v1(138.913,208.61)
NetFPGA_D15: FPGA.D15 JTAG.10 | length 77.9
  Top Layer w0.1: FPGA.D15@151.447,184.607 151.841,185.001 v1(151.841,185.014)
  Mid-Layer 1 w0.1: v1(151.841,185.014) 152.146,184.709 152.888,184.709 153.091,184.912 153.091,185.242 156.058,188.208 156.058,189.337 153.289,192.106 153.289,198.653 158.013,203.378 158.013,210.515 158.496,210.998 194.107,210.998 JTAG.10@200.914,217.805
NetFPGA_D16: FPGA.D16 JTAG.8 | length 80.2
  Top Layer w0.1: FPGA.D16@152.247,184.607 152.654,185.014 v1(152.654,185.064)
  Mid-Layer 1 w0.1: v1(152.654,185.064) 152.654,185.217 154.842,187.405 154.842,190.139 153.086,191.896 153.086,200.558 157.658,205.13 157.658,212.242 158.725,213.309 190.525,213.309 195.961,218.745 202.514,218.745 JTAG.8@203.454,217.805
NetFPGA_V2: FPGA.V2 R8.1 | length 49.6
  Top Layer w0.2: FPGA.V2@141.047,173.407 141.531,172.923 v1(142.291,172.923) ; v1(165.401,207.747) R8.1@165.401,208.915
  Mid-Layer 1 w0.2: v1(142.291,172.923) 160.884,191.516 160.934,207.747 v1(165.401,207.747)
NetFPGA_V17: FPGA.V17 JTAG.2 | length 101.3
  Top Layer w0.2: FPGA.V17@153.047,173.407 153.531,172.923 158.623,172.923 v1(160.071,174.371) ; v1(209.575,175.26) 209.575,216.306 JTAG.2@211.074,217.805
  Mid-Layer 1 w0.2: v1(160.071,174.371) 195.885,174.371 196.113,174.6 203.073,174.6 203.581,174.092 208.407,174.092 v1(209.575,175.26)
NetJ2_VGA1_8: J2_VGA1.8 P9_VGA1.1 | length 50
  Top Layer w0.2: P9_VGA1.1@63.119,80.137 70.383,87.401 70.383,125.023 J2_VGA1.8@71.87,126.51
NetJ2_VGA1_10: J2_VGA1.10 P8_VGA1.2 | length 46.4
  Top Layer w0.2: P8_VGA1.2@74.422,81.153 75.489,82.22 75.489,125.049 J2_VGA1.10@76.95,126.51
NetJ2_VGA1_11: J2_VGA1.11 P8_VGA1.4 | length 47.9
  Mid-Layer 2 w0.2: P8_VGA1.4@74.422,83.693 70.815,87.3 70.815,117.835 J2_VGA1.11@79.49,126.51
NetJ2_VGA2_8: J2_VGA2.8 P9_VGA2.1 | length 20.2
  Mid-Layer 1 w0.2: P9_VGA2.1@54.83,210.52 59.305,206.045 69.335,206.045 J2_VGA2.8@72.02,203.36
NetJ2_VGA2_10: J2_VGA2.10 P8_VGA2.2 | length 14.1
  Mid-Layer 1 w0.2: P8_VGA2.2@68.43,211.3 69.697,210.033 69.697,206.426 70.942,205.181 75.279,205.181 J2_VGA2.10@77.1,203.36
NetJ2_VGA2_11: J2_VGA2.11 P8_VGA2.4 | length 12
  Mid-Layer 1 w0.2: P8_VGA2.4@70.97,211.3 78.765,203.36 J2_VGA2.11@79.64,203.36
NetJTAG_1: JTAG.1 MCU.A8 | length 162.3
  Top Layer w0.2: v1(141.935,151.562) 141.935,128.651 143.029,127.557 MCU.A8@143.029,125.754 ; JTAG.1@211.074,220.345 212.141,219.278 v1(212.141,163.424)
  Mid-Layer 1 w0.2: v1(141.935,151.562) 144.043,153.67 208.407,153.67 209.118,154.381 209.118,160.401 v1(212.141,163.424)
NetL1_2: L1.2 USB_DATA.1 USB_ESD.5 | length 21.7
  Top Layer w0.2: L1.2@217.713,127.271 217.713,125.501 218.542,124.673 218.542,120.752 218.392,120.602 USB_ESD.5@218.392,118.442 224.231,118.442 224.783,117.89 USB_DATA.1@230.67,117.89
NetL2_1: L2.1 MCU.A10 | length 83.5
  Top Layer w0.2: MCU.A10@144.629,125.754 145.085,126.21 v1(145.085,127.584) ; v1(210.515,115.951) 214.189,112.277 L2.1@215.207,112.277
  Mid-Layer 1 w0.2: v1(148.361,116.561) 148.971,115.951 v1(210.515,115.951)
  Mid-Layer 2 w0.2: v1(145.085,127.584) 145.085,119.101 147.625,116.561 v1(148.361,116.561)
NetL2_2: L2.2 R5.1 USB_ESD.4 | length 9.5
  Top Layer w0.2: L2.2@217.907,112.277 218.392,112.762 USB_ESD.4@218.392,116.542 218.491,116.542 220.606,114.427 222.573,114.427 R5.1@222.573,114.444
NetL2_3: L2.3 R6.1 USB_ESD.3 | length 14.8
  Top Layer w0.2: USB_ESD.3@215.992,116.542 216.706,116.542 217.043,116.205 217.043,111.302 217.068,111.277 L2.3@217.907,111.277 220.955,111.277 222.319,109.913 R6.1@222.319,107.078
NetL2_4: L2.4 MCU.A11 | length 80.1
  Top Layer w0.2: MCU.A11@145.429,125.754 145.761,126.086 v1(145.821,126.086) ; v1(214.173,111.277) L2.4@215.207,111.277
  Mid-Layer 1 w0.2: v1(150.317,116.688) 210.515,116.688 214.173,113.03 v1(214.173,111.277)
  Mid-Layer 2 w0.2: v1(145.821,126.086) 145.694,125.959 145.694,121.31 v1(150.317,116.688)
NetL3_2: L3.2 USB_DATA.5 | length 25.6
  Top Layer w0.2: L3.2@217.713,122.953 217.713,123.927 216.967,124.673 216.967,127.927 216.992,127.953 220.485,127.953 220.662,127.775 220.662,121.408 220.98,121.09 USB_DATA.5@230.67,121.09
NetL4_2: L4.2 USB_DATA.6 USB_DATA.7 USB_DATA.8 USB_DATA.9 | length 26
  Top Layer w0.2: L4.2@224.19,127.271 224.633,127.271 227.489,124.415 USB_DATA.8@230.645,124.415 USB_DATA.9@234.895,124.415 USB_DATA.7@234.895,114.565 USB_DATA.6@230.645,114.565
NetL5_2: L5.2 USB_POWER.5 | length 7.8
  Top Layer w0.2: USB_POWER.5@134.645,85.725 134.645,89.154 135.315,89.824 L5.2@135.315,93.29
NetL6_2: L6.2 USB_POWER.6 USB_POWER.7 USB_POWER.8 USB_POWER.9 | length 25.8
  Top Layer w0.2: L6.2@128.565,92.98 128.565,89.574 128.12,89.129 USB_POWER.6@128.12,85.75 USB_POWER.7@128.12,81.5 USB_POWER.9@137.97,81.5 USB_POWER.8@137.97,85.75
NetP5_1: P5.1 USB_POWER.1 | length 15.1
  Top Layer w0.2: 130.56,89.589 130.56,89.66 ; USB_POWER.1@131.445,85.725 USB_POWER.1@131.445,86.785
  Top Layer w0.7: 130.56,87.67 USB_POWER.1@131.445,86.785
  Top Layer w1: 130.56,87.67 130.56,89.589 ; 130.56,89.66 v5@131.86,90.96
  Mid-Layer 1 w0.2: v5(131.86,91) v5@132.13,91
  Mid-Layer 1 w1: v5@132.13,91 134.85,93.72 P5.1@134.85,98.6
NetP5_2: P5.2 P6.1 P7.1 | length 51
  Mid-Layer 1 w0.2: 118.18,98.28 118.303,98.28 118.303,98.402
  Mid-Layer 1 w0.8: P7.1@112.34,92.44 118.18,98.28 ; 118.303,98.402 120.69,100.79 130.12,100.79 P5.2@132.31,98.6 ; P6.1@154.25,93.1 P6.1@154.25,93.5
  Mid-Layer 1 w1: P5.2@132.31,98.6 134.84,101.13 146.62,101.13 P6.1@154.25,93.5
NetR5_2: R5.2 USB_DATA.2 | length 11.6
  Top Layer w0.2: v1(224.195,113.93) 225.273,112.852 R5.2@225.273,114.444 ; v1(228.956,118.69) USB_DATA.2@230.67,118.69
  Mid-Layer 2 w0.2: v1(224.195,113.93) v1(228.956,118.69)
NetR6_2: R6.2 USB_DATA.3 | length 19.8
  Top Layer w0.2: R6.2@225.019,107.078 225.019,109.855 225.349,110.185 v1(229.743,110.185) ; USB_DATA.3@230.67,119.49 v1(232.385,119.49)
  Mid-Layer 2 w0.2: v1(229.743,110.185) 229.743,116.848 v1(232.385,119.49)
NetSP_CON_1: SP_CON.1 SP_H.16 | length 22
  Mid-Layer 1 w0.2: SP_H.16@173.99,104.013 178.587,99.416 187.427,99.416 SP_CON.1@192.103,94.74
NetSP_CON_2: SP_CON.2 SPD.14 | length 29.1
  Top Layer w0.2: SPD.14@213.909,87.093 v1(213.909,89.383)
  Bottom Layer w0.2: SP_CON.2@189.333,94.74 190.499,93.574 193.599,93.574 197.79,89.383 v1(213.909,89.383)
NetSP_CON_3: SP_CON.3 SPD.13 | length 34.4
  Top Layer w0.2: SPD.13@214.559,87.093 v1(214.559,90.526)
  Bottom Layer w0.2: SP_CON.3@186.563,94.74 188.089,96.266 208.819,96.266 v1(214.559,90.526)
NetSP_CON_4: SP_CON.4 SP_H.4 | length 11.5
  Top Layer w0.2: SP_CON.4@183.793,94.74 189.23,100.177 SP_H.4@189.23,104.013
NetSP_CON_6: SP_CON.6 SP_H.14 | length 21.7
  Bottom Layer w0.2: SP_H.14@176.53,104.013 182.639,97.904 182.639,93.662 182.982,93.32 189.298,93.32 SP_CON.6@190.718,91.9
NetSP_CON_7: SP_CON.7 SPD.7 | length 35.3
  Top Layer w0.2: SPD.7@216.509,80.293 v1(216.509,82.042)
  Mid-Layer 1 w0.2: SP_CON.7@187.948,91.9 194.936,84.912 208.229,84.912 212.141,81.001 213.36,81.001 214.401,82.042 v1(216.509,82.042)
NetSP_CON_8: SP_CON.8 SPD.8 | length 39.3
  Top Layer w0.2: SPD.8@217.159,80.293 217.159,78.573 v1(217.17,78.562)
  Mid-Layer 1 w0.2: SP_CON.8@185.178,91.9 198.516,78.562 v1(217.17,78.562)
NetSP_CON_9: SP_CON.9 SP_H.2 | length 16.6
  Top Layer w0.2: SP_CON.9@182.408,91.9 183.442,91.9 185.166,93.624 185.166,95.428 191.77,102.032 SP_H.2@191.77,104.013
NetSP_H_6: SP_H.6 SPD.9 | length 38.5
  Top Layer w0.2: SPD.9@217.159,87.093 v1(217.159,88.78)
  Mid-Layer 1 w0.2: SP_H.6@186.69,104.013 188.773,101.93 196.621,101.93 209.771,88.78 v1(217.159,88.78)
NetSP_H_8: SP_H.8 SPD.12 | length 43.1
  Top Layer w0.2: SPD.12@215.209,87.093 v1(215.209,94.188)
  Bottom Layer w0.2: SP_H.8@184.15,104.013 185.217,105.08 204.318,105.08 v1(215.209,94.188)
NetSP_H_10: SP_H.10 SPD.10 | length 44.1
  Top Layer w0.2: SPD.10@216.509,87.093 v1(216.509,89.281)
  Mid-Layer 1 w0.2: SP_H.10@181.61,104.013 182.448,104.851 182.88,104.851 183.109,105.08 197.561,105.08 212.674,89.967 215.823,89.967 v1(216.509,89.281)
NetSP_H_12: SP_H.12 SPD.11 | length 46.1
  Top Layer w0.2: v1(211.785,85.242) 215.376,85.242 215.859,85.725 SPD.11@215.859,87.093
  Mid-Layer 1 w0.2: SP_H.12@179.07,104.013 181.966,101.117 195.91,101.117 v1(211.785,85.242)
OUTPUT: C26.1 FPGA_CLK.3 | length 5.8
  Top Layer w0.2: FPGA_CLK.3@147.574,161.374 147.574,164.236 147.621,164.283 C26.1@147.621,167.148
SPI.BACKUP_CLK: FPGA.T14 SPI_HEADER.6 | length 100.2
  Top Layer w0.1: FPGA.T14@150.647,175.007 v1(151.054,174.6) ; v1(179.578,171.221) 179.578,171.907 172.491,178.994 171.907,178.994 171.806,178.892 171.806,170.713 178.283,164.236 178.283,156.439 177.648,155.804 177.648,132.74 SPI_HEADER.6@183.515,126.873
  Mid-Layer 1 w0.1: v1(151.054,174.6) 151.435,174.219 154.858,174.219 155.524,174.884 156.096,174.884 156.228,174.752 156.228,174.538 159.773,170.993 179.349,170.993 v1(179.578,171.221)
SPI.BACKUP_CS: FPGA.V14 SPI_HEADER.8 | length 82.6
  Top Layer w0.2: FPGA.V14@150.647,173.407 152.344,171.71 160.547,171.71 160.833,171.425 160.833,149.771 162.243,148.361 167.458,148.361 169.452,146.368 169.452,131.208 177.394,123.266 186.69,123.266 187.122,123.698 187.122,125.806 SPI_HEADER.8@186.055,126.873
SPI.BACKUP_RX: FPGA.V15 SPI_HEADER.4 | length 66.8
  Top Layer w0.2: FPGA.V15@151.447,173.407 152.744,172.11 161.011,172.11 161.417,171.704 161.417,150.063 161.925,149.555 167.416,149.555 169.852,147.119 169.852,137.996 SPI_HEADER.4@180.975,126.873
SPI.BACKUP_TX: FPGA.U15 SPI_HEADER.2 | length 76.6
  Top Layer w0.1: FPGA.U15@151.447,174.207 v1(151.867,173.787)
  Mid-Layer 2 w0.1: v1(151.867,173.787) 151.867,172.06 154.483,169.443 154.483,148.844 154.802,148.525 154.802,145.212 155.245,144.769 156.275,144.769 156.837,145.331 156.837,146.097 157.553,146.812 178.968,146.812 179.476,146.304 179.476,127.914 SPI_HEADER.2@178.435,126.873
UART0.CTRL_RX: MCU.L5 SP_H.5 | length 55.1
  Top Layer w0.2: MCU.L5@140.629,117.754 140.818,117.565 v1(140.818,115.214)
  Mid-Layer 1 w0.2: v1(140.818,115.214) 141.021,115.011 158.013,115.011 167.945,105.08 178.029,105.08 178.359,105.41 182.88,105.41 183.083,105.613 183.083,107.188 183.515,107.62 185.623,107.62 SP_H.5@186.69,106.553
UART0.CTRL_TX: MCU.L6 SP_H.9 | length 48.8
  Top Layer w0.2: v1(141.429,115.519) MCU.L6@141.429,117.754
  Mid-Layer 1 w0.2: v1(141.429,115.519) 162.763,115.519 172.796,105.486 177.482,105.486 177.8,105.804 177.8,107.302 178.118,107.62 180.543,107.62 SP_H.9@181.61,106.553
UART0.RX: MCU.A6 SP_H.7 | length 58.7
  Top Layer w0.2: MCU.A6@141.429,125.754 v1(141.429,131.42)
  Bottom Layer w0.2: v1(141.429,131.42) 159.283,131.42 SP_H.7@184.15,106.553
UART0.TX: MCU.B7 SP_H.11 | length 57.1
  Top Layer w0.1: v1(142.138,127.152) 142.215,127.152 142.621,126.746 142.621,125.616 142.229,125.224 MCU.B7@142.229,124.954
  Mid-Layer 1 w0.1: v1(142.138,127.152) 142.138,127.356 142.443,127.66 143.789,127.66 144.958,126.492 171.45,126.492 v1(172.11,127.152)
  Mid-Layer 2 w0.1: v1(172.11,127.152) 179.07,120.193 SP_H.11@179.07,106.553
pads on no net: ?. Arm_prog.2 Arm_prog.3 Arm_prog.5 Arm_prog.11 Arm_prog.17 Arm_prog.19 FPGA.A10 FPGA.A11 FPGA.A12 FPGA.A13 FPGA.A14 FPGA.A15 FPGA.A16 FPGA.B11 FPGA.B12 FPGA.B14 FPGA.B16 FPGA.C2 FPGA.C4 FPGA.C5 FPGA.C12 FPGA.C13 FPGA.C14 FPGA.C15 FPGA.D1 FPGA.D2 FPGA.D3 FPGA.D4 FPGA.D12 FPGA.D14 FPGA.E1 FPGA.E3 FPGA.E4 FPGA.E6 FPGA.E7 FPGA.E8 FPGA.E11 FPGA.E12 FPGA.E13 FPGA.F1 FPGA.F3 FPGA.F4 FPGA.F5 FPGA.F6 FPGA.F7 FPGA.F8 FPGA.F9 FPGA.F10 FPGA.F11 FPGA.F12 FPGA.F13 FPGA.G6 FPGA.G8 FPGA.G9 FPGA.G11 FPGA.H5 FPGA.H6 FPGA.H7 FPGA.L14 FPGA.M13 FPGA.M14 FPGA.M18 FPGA.N11 FPGA.N12 FPGA.N14 FPGA.N15 FPGA.N16 FPGA.N17 FPGA.N18 FPGA.P15 FPGA.P16 FPGA.R13 FPGA.T6 FPGA.T17 FPGA.T18 FPGA.U17 FPGA.U18 FPGA.V3 J1_VGA1.11 J1_VGA2.11 J2_VGA1.5 J2_VGA2.5 MCU.E5 MCU.E6 MCU.E7 MCU.F5 MCU.F6 MCU.F7 MCU.G5 MCU.G6 MCU.G7 P1.1 P2.1 P2.3 P3.1 P4.2 P4.3 P8_VGA1.1 P8_VGA1.3 P8_VGA2.1 P8_VGA2.3 P9_VGA1.2 P9_VGA2.2 USB_DATA.4 USB_DATA.X USB_DATA.Y USB_ESD.1 USB_POWER.2 USB_POWER.3 USB_POWER.4 USB_POWER.X USB_POWER.Y VR1.4 VR2.4 XLOW.2 XLOW.3
copper on no net: | length 0
  Top Layer w0.2: 131.86,90.96 131.86,91
  other v3: 235.703,81.779 56.379,82.033 235.449,220.971 56.125,221.098

## Keep-outs
Keep-Out Layer:
  lines w0.3: 52.1,77.5 52.1,224.9 239.5,224.9 239.5,77.5 52.1,77.5

## Text inside footprints (layer, text, board x,y; h text height)
Arm_prog: Top Overlay "20" at 211.963,98.171 h1.27 r180; Top Overlay "19" at 211.963,100.711 h1.27 r180; Top Overlay "1" at 238.887,100.711 h1.27 r180; Top Overlay "2" at 238.887,98.171 h1.27 r180
EBI_address: Top Overlay "2" at 203.18,142.43 h1.27; Top Overlay "1" at 203.26,145.04 h1.27; Top Overlay "59" at 123.53,144.89 h1.27; Top Overlay "60" at 123.6,142.43 h1.27
EBI_DATA: Top Overlay "2" at 115.21,142.58 h1.27; Top Overlay "1" at 115.28,145.04 h1.27; Top Overlay "31" at 71.32,145.11 h1.27; Top Overlay "32" at 70.96,142.65 h1.27
GPIO: Top Overlay "2" at 237.109,148.717 h1.27 r180; Top Overlay "1" at 236.601,151.257 h1.27 r180; Top Overlay "7" at 225.425,151.257 h1.27 r180; Top Overlay "8" at 225.425,148.717 h1.27 r180
HDMI_header: Top Overlay "2" at 138.811,208.026 h1.27; Top Overlay "1" at 138.811,205.486 h1.27; Top Overlay "15" at 160.655,205.486 h1.27; Top Overlay "16" at 160.655,208.026 h1.27
JTAG: Top Overlay "10" at 199.39,218.313 h1.27 r180; Top Overlay "9" at 199.39,220.853 h1.27 r180; Top Overlay "1" at 213.106,220.853 h1.27 r180; Top Overlay "2" at 213.614,218.313 h1.27 r180
MEM1_ADDR: Top Overlay "2" at 167.005,159.258 h1.27; Top Overlay "1" at 167.005,156.718 h1.27; Top Overlay "37" at 216.789,156.718 h1.27; Top Overlay "38" at 216.789,159.258 h1.27
MEM1_CTRL: Top Overlay "2" at 179.07,174.117 h1.27 r90; Top Overlay "1" at 181.61,174.625 h1.27 r90; Top Overlay "7" at 181.61,185.801 h1.27 r90; Top Overlay "8" at 179.07,185.801 h1.27 r90
MEM1_DATA: Top Overlay "2" at 215.62,202.31 h1.27; Top Overlay "1" at 215.78,204.78 h1.27; Top Overlay "31" at 172.29,204.62 h1.27; Top Overlay "32" at 171.33,202.08 h1.27
MEM2_ADDR: Top Overlay "2" at 135.05,156.84 h1.27; Top Overlay "1" at 135.05,159.52 h1.27; Top Overlay "37" at 83.49,159.38 h1.27; Top Overlay "38" at 83.34,156.84 h1.27
MEM2_CTRL: Top Overlay "2" at 119.761,184.785 h1.27 r270; Top Overlay "1" at 117.221,184.277 h1.27 r270; Top Overlay "7" at 117.221,173.101 h1.27 r270; Top Overlay "8" at 119.761,173.101 h1.27 r270
MEM2_DATA: Top Overlay "2" at 91.821,206.502 h1.27; Top Overlay "1" at 91.821,203.962 h1.27; Top Overlay "31" at 133.985,203.962 h1.27; Top Overlay "32" at 133.985,206.502 h1.27
P2: Top Overlay "1" at 188.468,214.757 h1.27 r90; Top Overlay "2" at 185.928,214.249 h1.27 r90; Top Overlay "4" at 185.928,220.853 h1.27 r90; Top Overlay "3" at 188.468,220.853 h1.27 r90
P8_VGA1: Top Overlay "1" at 77.47,79.121 h1.27 r90; Top Overlay "2" at 74.93,78.613 h1.27 r90; Top Overlay "4" at 74.93,85.217 h1.27 r90; Top Overlay "3" at 77.47,85.217 h1.27 r90
P8_VGA2: Top Overlay "1" at 66.398,208.252 h1.27; Top Overlay "2" at 65.89,210.792 h1.27; Top Overlay "4" at 72.494,210.792 h1.27; Top Overlay "3" at 72.494,208.252 h1.27
SP_CON: Top Overlay "6" at 191.218,88.795 h1.5 r180; Top Overlay "9" at 182.908,88.795 h1.5 r180; Top Overlay "5" at 181.523,98.195 h1.5 r180; Top Overlay "1" at 192.353,98.195 h1.5 r180
SP_H: Top Overlay "2" at 193.675,103.251 h1.27; Top Overlay "1" at 193.675,106.172 h1.27; Top Overlay "15" at 170.18,106.045 h1.27; Top Overlay "16" at 170.18,103.251 h1.27
SPI_HEADER: Top Overlay "2" at 175.895,126.365 h1.27; Top Overlay "1" at 176.403,123.825 h1.27; Top Overlay "7" at 187.579,123.825 h1.27; Top Overlay "8" at 187.579,126.365 h1.27
?: Top Overlay "HDMI" at 158.805,214.797 h1.52 r180